# EAGLE board open-jar-tester_individual_motor_pwm_driver (EAGLE 7.3.0)
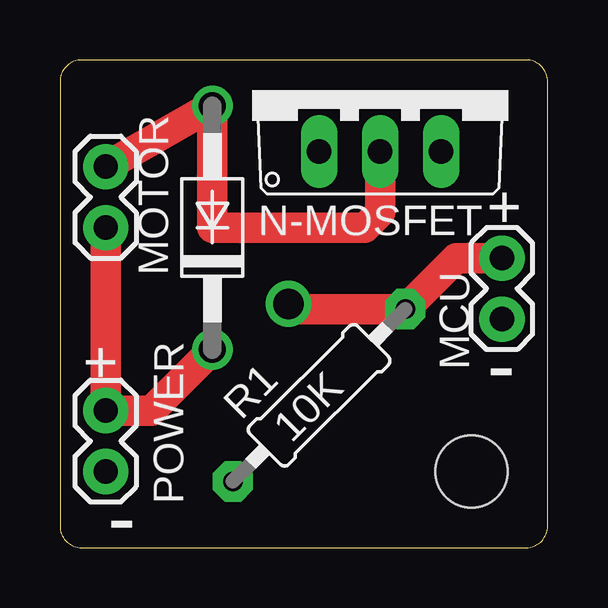
[diagram p0: board, top side]
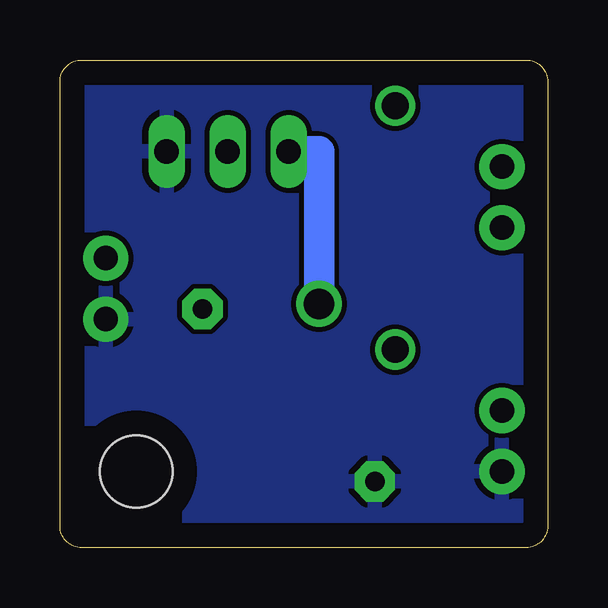
[diagram p1: board, bottom side, seen from below]

Size 20.32 x 20.32 mm. Coordinates in mm from the lower left corner, seen from the top.
Outline: 0,19.42 0,0.9 arc90 0.9,0 19.42,0 arc90 20.32,0.9 20.32,19.42 arc90 19.42,20.32 0.9,20.32 arc90 0,19.42
Copper layers (1*16): Top 0.035mm / dielectric 1.5mm / Bottom 0.035mm
Design rules "default": minimum track width 10mil, minimum drill 24mil, track to track 8mil, track to pad 8mil, pad to pad 8mil, via to via 8mil, smd to smd 8mil, copper to edge 40mil, drill to drill 8mil, minimum pad ring 10mil, minimum via ring 8mil, stop-mask expansion 4mil, vias tented up to drill 0mil, thermal gap 10mil
Holes 3.02 mm at 17.14,3.17

## Footprints (pad centres in the part's own frame; a part is rotated, then mirrored left to right if it is on the bottom)
DO41-10 = drill 1.118: A 5.08,0; C -5.08,0
1X02 = drill 1.016 pad 1.88: 1 0,0; 2 2.54,0
TO220V = drill 1.016 long: 1 -2.54,-2.54; 2 0,-2.54; 3 2.54,-2.54
0207/10 = drill 0.813 pad 1.676 octagon: 1 -5.08,0; 2 5.08,0

## Placement (x,y rotation side)
D1  1N4004  [DO41-10]  6.35,13.34 90 top
MCU  [1X02]  18.41,12.06 270 top
MOTOR  [1X02]  1.91,13.34 90 top
N-MOSFET  [TO220V]  13.34,19.05 0 top
POWER  [1X02]  1.91,3.17 90 top
R1  10K  [0207/10]  10.79,6.35 45 top

## Library data of the parts
D1 = diode
MCU MOTOR POWER = SparkFun-Connectors
N-MOSFET R1 = adafruit

## Nets
GND: MCU.2 N-MOSFET.3 POWER.1 R1.1
N$2: MCU.1 N-MOSFET.1 R1.2
N$3: D1.A MOTOR.2 N-MOSFET.2
N$4: D1.C MOTOR.1 POWER.2

## Tracks (layer width: path | path; a pad name or v marks a point on that pad's centre or on a via)
GND
  pour Bottom: 0,20.32 20.32,20.32 20.32,0 0,0
N$2  (via drill 1.27)
  Top 0.61: R1.2 14.61,9.94
  Top 1.27: 14.61,9.94 14.61,10.16 16.51,12.06 MCU.1 | R1.2 9.74,9.94 v9.53,10.16
  Bottom 1.27: v9.53,10.16 9.53,16.51 N-MOSFET.1
N$3
  Top 1.27: MOTOR.2 D1.A 6.35,13.34 12.7,13.34 13.34,13.97 N-MOSFET.2
N$4
  Top 1.27: MOTOR.1 POWER.2 3.81,5.71 D1.C

## Text on the board
tPlace: + | + | - | -